# EAGLE board integration_board_widertraces (EAGLE 6.6.0)
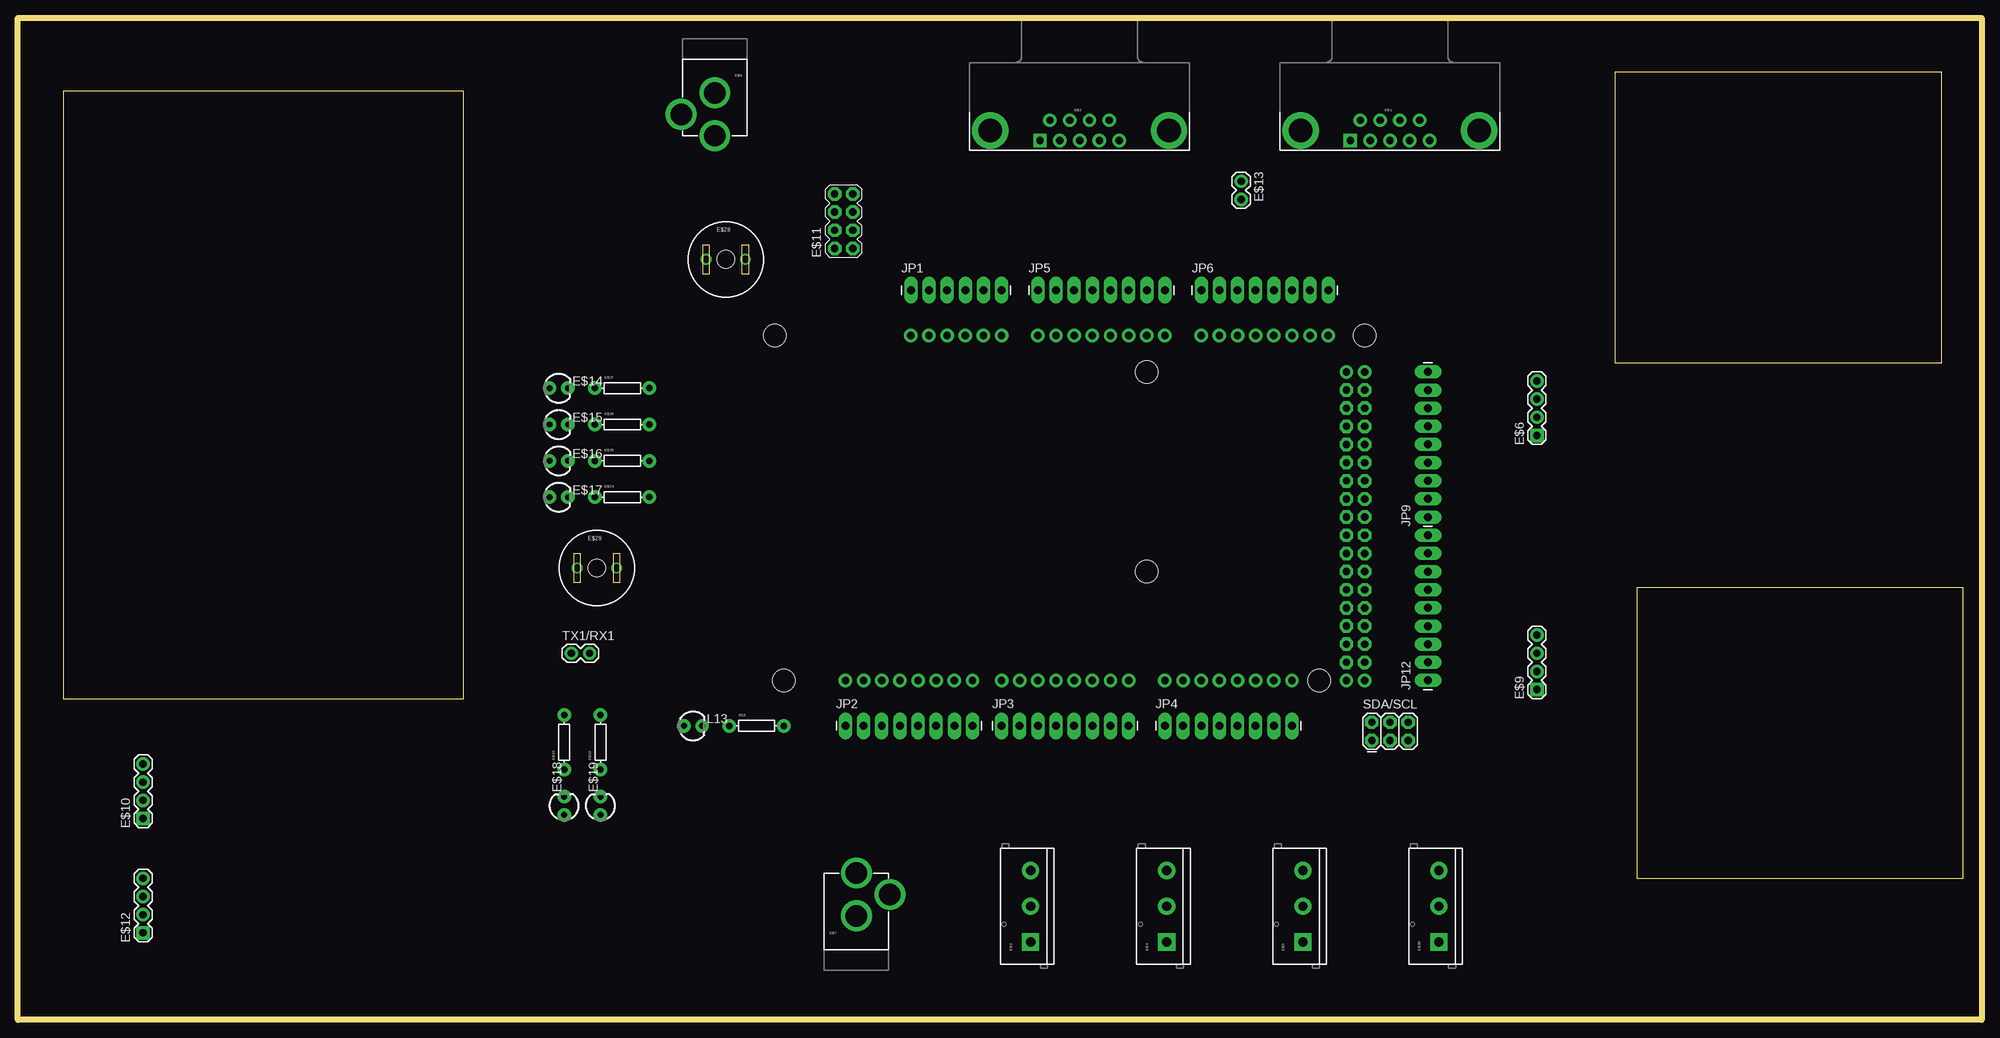
[diagram p0: board, top side]
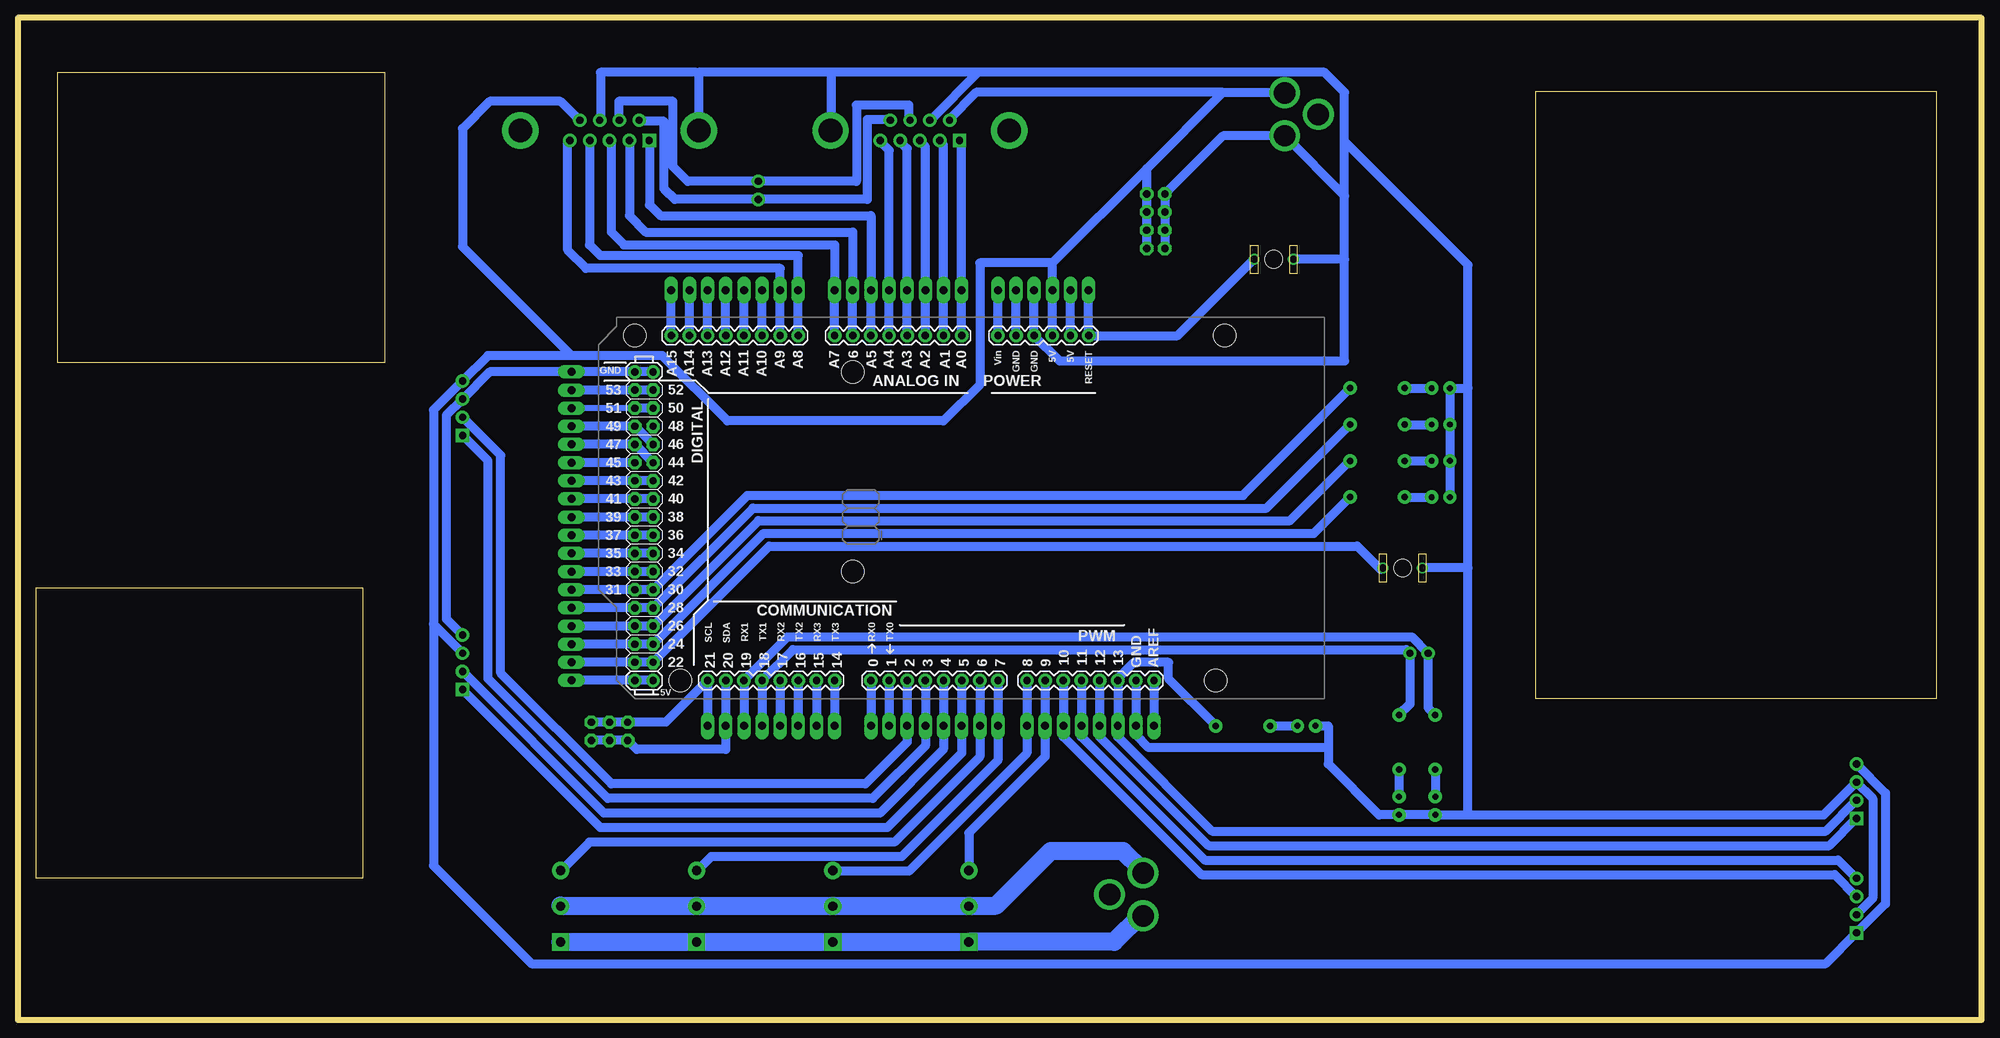
[diagram p1: board, bottom side, seen from below]

Size 274.83 x 140.21 mm. Coordinates in mm from the lower left corner, seen from the top.
Outline: 0,140.21 274.83,140.21 274.83,0 0,0 0,140.21
Copper layers (1*16): Top 0.035mm / dielectric 1.5mm / Bottom 0mil
Design rules "default *": minimum track width 32mil, minimum drill 24mil, track to track 8mil, track to pad 8mil, pad to pad 8mil, via to via 8mil, smd to smd 8mil, copper to edge 40mil, drill to drill 8mil, minimum pad ring 10mil, minimum via ring 8mil, stop-mask expansion 4mil, vias tented up to drill 0mil, thermal gap 10mil

## Footprints (pad centres in the part's own frame; a part is rotated, then mirrored left to right if it is on the bottom)
DB9 = drill 1.016 pad 1.88 square: 1 -5.54,-1.42 | drill 1.016 pad 1.88: 2 -2.77,-1.42; 3 0,-1.42; 4 2.77,-1.42; 5 5.54,-1.42; 6 -4.15,1.42; 7 -1.38,1.42; 8 1.38,1.42; 9 4.15,1.42 | drill 3.302 pad 5.08: G1 -12.5,0; G2 12.5,0
SCREWTERMINAL-5MM-3 = drill 1.3 pad 2.413 square: 1 0,0 | drill 1.3 pad 2.413: 2 5,0; 3 10,0
1X04 = drill 1.016 pad 1.88 square: 1 0,0 | drill 1.016 pad 1.88: 2 2.54,0; 3 5.08,0; 4 7.62,0
POWER_JACK_PTH = drill 2.997 pad 4.318: GND 0,7.7; GNDBREAK 4.7,10.7; PWR 0,13.7
2X4 = drill 1.016 pad 1.88 octagon: 1 -3.81,-1.27; 2 -3.81,1.27; 3 -1.27,-1.27; 4 -1.27,1.27; 5 1.27,-1.27; 6 1.27,1.27; 7 3.81,-1.27; 8 3.81,1.27
1X02 = drill 1.016 pad 1.88: 1 0,0; 2 2.54,0
LED3MM = drill 0.813 pad 1.88: A -1.27,0; K 1.27,0
AXIAL-0.3 = drill 0.9 pad 1.88: P$1 -3.81,0; P$2 3.81,0
BUTTON-10MM = drill 1: 1 -2.75,0; 2 2.75,0 | hole 2.5: 0,0
1X06_LONGPADS = drill 1.118 pad 1.88 long: 1 0,0; 2 2.54,0; 3 5.08,0; 4 7.62,0; 5 10.16,0; 6 12.7,0
1X08_LONGPADS = drill 1.118 pad 1.88 long: 1 0,0; 2 2.54,0; 3 5.08,0; 4 7.62,0; 5 10.16,0; 6 12.7,0; 7 15.24,0; 8 17.78,0
1X09_LONGPADS = drill 1.118 pad 1.88 long: 1 0,0; 2 2.54,0; 3 5.08,0; 4 7.62,0; 5 10.16,0; 6 12.7,0; 7 15.24,0; 8 17.78,0; 9 20.32,0
2X3 = drill 1.016 pad 1.88 octagon: 1 0,0; 2 0,2.54; 3 2.54,0; 4 2.54,2.54; 5 5.08,0; 6 5.08,2.54
ARDUINO_MEGA = drill 1.016 pad 1.88: 0 63.5,50.8; 1 60.96,50.8; 2 58.42,50.8; 3 55.88,50.8; 3.3V 35.56,2.54; 4 53.34,50.8; 5 50.8,50.8; 5V@0 38.1,2.54; 5V@1 93.98,50.8; 5V@2 96.52,50.8; 6 48.26,50.8; 7 45.72,50.8; 8 41.656,50.8; 9 39.116,50.8; 10 36.576,50.8; 11 34.036,50.8; 12 31.496,50.8; 13 28.956,50.8; 14 68.58,50.8; 15 71.12,50.8; 16 73.66,50.8; 17 76.2,50.8; 18 78.74,50.8; 19 81.28,50.8; 20 83.82,50.8; 21 86.36,50.8; A0 50.8,2.54; A1 53.34,2.54; A2 55.88,2.54; A3 58.42,2.54; A4 60.96,2.54; A5 63.5,2.54; A6 66.04,2.54; A7 68.58,2.54; A8 73.66,2.54; A9 76.2,2.54; A10 78.74,2.54; A11 81.28,2.54; A12 83.82,2.54; A13 86.36,2.54; A14 88.9,2.54; A15 91.44,2.54; AREF 23.876,50.8; GND@0 40.64,2.54; GND@1 43.18,2.54; GND@2 93.98,7.62; GND@3 96.52,7.62; GND@4 26.416,50.8; RESET 33.02,2.54; VIN 45.72,2.54 | drill 1.016 pad 1.88 octagon: 22 93.98,48.26; 23 96.52,48.26; 24 93.98,45.72; 25 96.52,45.72; 26 93.98,43.18; 27 96.52,43.18; 28 93.98,40.64; 29 96.52,40.64; 30 93.98,38.1; 31 96.52,38.1; 32 93.98,35.56; 33 96.52,35.56; 34 93.98,33.02; 35 96.52,33.02; 36 93.98,30.48; 37 96.52,30.48; 38 93.98,27.94; 39 96.52,27.94; 40 93.98,25.4; 41 96.52,25.4; 42 93.98,22.86; 43 96.52,22.86; 44 93.98,20.32; 45 96.52,20.32; 46 93.98,17.78; 47 96.52,17.78; 48 93.98,15.24; 49 96.52,15.24; 50 93.98,12.7; 51 96.52,12.7; 52 93.98,10.16; 53 96.52,10.16 | hole 3.2: 15.24,50.8; 13.97,2.54; 66.04,35.56; 66.04,7.62; 90.17,50.8; 96.52,2.54

## Placement (x,y rotation side)
E$1  [DB9]  192.02,124.46 0 top
E$2  [DB9]  148.59,124.46 0 top
E$3  [SCREWTERMINAL-5MM-3]  141.73,10.92 90 top
E$4  [SCREWTERMINAL-5MM-3]  160.78,10.92 90 top
E$5  [SCREWTERMINAL-5MM-3]  179.83,10.92 90 top
E$6  [1X04]  212.6,81.79 90 top
E$7  [POWER_JACK_PTH]  117.35,6.86 0 top
E$8  [POWER_JACK_PTH]  97.54,137.41 180 top
E$9  [1X04]  212.6,46.23 90 top
E$10  [1X04]  17.53,28.19 90 top
E$11  [2X4]  115.57,111.76 90 top
E$12  [1X04]  17.53,12.19 90 top
E$13  [1X02]  171.2,117.35 270 top
E$14  [LED3MM]  75.69,88.39 0 top
E$15  [LED3MM]  75.69,83.31 0 top
E$16  [LED3MM]  75.69,78.23 0 top
E$17  [LED3MM]  75.69,73.15 0 top
E$18  [LED3MM]  76.45,29.97 90 top
E$19  [LED3MM]  81.53,29.97 90 top
E$22  [AXIAL-0.3]  81.53,38.86 90 top
E$23  [AXIAL-0.3]  76.45,38.86 90 top
E$24  [AXIAL-0.3]  84.58,73.15 0 top
E$25  [AXIAL-0.3]  84.58,78.23 0 top
E$26  [AXIAL-0.3]  84.58,83.31 0 top
E$27  [AXIAL-0.3]  84.58,88.39 0 top
E$28  [BUTTON-10MM]  99.06,106.43 0 top
E$29  [BUTTON-10MM]  81.03,63.25 0 top
E$30  [SCREWTERMINAL-5MM-3]  198.88,10.92 90 top
JP1  [1X06_LONGPADS]  124.97,102.11 0 top
JP2  [1X08_LONGPADS]  115.82,41.15 0 top
JP3  [1X08_LONGPADS]  137.67,41.15 0 top
JP4  [1X08_LONGPADS]  160.53,41.15 0 top
JP5  [1X08_LONGPADS]  142.75,102.11 0 top
JP6  [1X08_LONGPADS]  165.61,102.11 0 top
JP9  [1X09_LONGPADS]  197.36,70.36 90 top
JP12  [1X09_LONGPADS]  197.36,47.5 90 top
L13  [LED3MM]  94.49,41.15 0 top
R13  [AXIAL-0.3]  103.38,41.15 0 top
SDA/SCL  [2X3]  189.48,39.12 0 top
TX1/RX1  [1X02]  77.47,51.31 0 top
U1  ARDUINO-MEGAFULL  [ARDUINO_MEGA]  91.95,98.3 180 bottom

## Library data of the parts
E$1-E$13 E$30 JP1-JP6 JP9 JP12 SDA/SCL TX1/RX1 = SparkFun-Connectors
E$14-E$19 L13 = SparkFun-LED
E$22-E$27 R13 = SparkFun-Resistors
E$28 E$29 = SparkFun-Electromechanical
U1 = SparkFun-Boards

## Nets
S$1: JP1.1 U1.RESET
S$2: JP1.2 U1.3.3V
S$3: E$10.3 E$11.2 E$11.4 E$11.6 E$11.8 E$12.2 E$14.A E$15.A E$16.A E$17.A E$18.A E$19.A JP1.4 JP2.2 L13.A U1.GND@0 U1.GND@4
S$5: JP1.5 U1.GND@1
S$6: JP1.6 U1.VIN
S$7: JP5.1 U1.A0
S$8: JP5.2 U1.A1
S$9: JP5.3 U1.A2
S$10: JP5.4 U1.A3
S$11: JP5.5 U1.A4
S$12: E$6.3 E$9.4
S$13: JP5.7 U1.A6
S$14: JP5.6 U1.A5
S$16: E$13.1
S$17: JP6.3 U1.A10
S$18: JP6.4 U1.A11
S$19: JP6.5 U1.A12
S$20: JP6.6 U1.A13
S$21: JP6.7 U1.A14
S$22: JP6.8 U1.A15
S$23: JP2.6 U1.10
S$24: R13.P$2
S$25: E$13.2
S$26: E$3.1 E$30.1
S$27: JP2.4 U1.12
S$28: JP2.7 U1.9
S$29: JP2.1 U1.AREF
S$31: JP2.5 U1.11
S$33: E$9.1 JP3.3 U1.5
S$34: E$9.2 JP3.4 U1.4
S$35: E$6.1 JP3.5 U1.3
S$36: E$6.2 JP3.6 U1.2
S$37: JP2.8 U1.8
S$39: JP4.1 U1.14
S$40: JP4.2 U1.15
S$41: JP4.3 U1.16
S$42: JP4.4 U1.17
S$43: E$22.P$2 JP4.5 TX1/RX1.2 U1.18
S$44: E$23.P$2 JP4.6 TX1/RX1.1 U1.19
S$45: JP4.7 SDA/SCL.1 SDA/SCL.5 U1.20
S$46: JP4.8 SDA/SCL.2 SDA/SCL.6 U1.21
S$47: E$27.P$2 JP12.6 U1.30
S$48: JP12.2 U1.22
S$49: E$24.P$2 JP12.3 U1.24
S$50: E$25.P$2 JP12.4 U1.26
S$51: E$26.P$2 JP12.5 U1.28
S$53: JP12.7 U1.32
S$54: JP12.8 U1.34
S$55: JP12.9 U1.36
S$56: JP9.1 U1.38
S$57: JP9.2 U1.40
S$58: JP9.3 U1.42
S$59: JP9.7 U1.50
S$60: JP9.8 U1.52
S$62: JP9.6 U1.46
S$63: JP9.5 U1.44
S$64: JP9.4 U1.45
S$67: JP9.9 U1.GND@2
S$68: JP3.7 U1.1
S$72: JP12.1 U1.5V@1
S$73: JP3.8 U1.0
S$74: E$14.K E$27.P$1
S$75: E$15.K E$26.P$1
S$76: E$16.K E$25.P$1
S$77: E$17.K E$24.P$1
S$78: E$18.K E$23.P$1
S$79: E$19.K E$22.P$1
S$80: L13.K R13.P$1
S$82: JP6.1 U1.A8
S$83: JP3.1 U1.7
S$84: JP3.2 U1.6
S$85: JP2.3 U1.13
S$86: JP5.8 U1.A7
S$87: E$10.2
S$88: E$10.1
S$89: E$12.4
S$90: E$12.3
S$91: U1.48
S$95: E$6.4 E$9.3 E$10.4 E$11.1 E$11.3 E$11.5 E$11.7 E$12.1 JP1.3 U1.5V@0
S$97: JP6.2 U1.A9

## Tracks (layer width: path | path; a pad name or v marks a point on that pad's centre or on a via)
S$1
  Bottom 1.27: U1.RESET JP1.1 124.97,102.36 | U1.RESET 112.52,95.76 101.85,106.43 | U1.RESET 124.97,95.5
S$2
  Bottom 1.27: 127.51,95.5 U1.3.3V JP1.2 127.51,102.36
S$3
  Bottom 0.813: 118.36,39.88 JP2.2 | 132.59,103.38 132.59,102.36 | 179.83,132.59 179.58,132.59
  Bottom 1.27: 118.36,47.75 U1.GND@4 JP2.2 118.36,40.89 | 118.36,39.88 116.59,38.1 91.44,38.1 | L13.A 91.44,41.15 91.44,38.1 | 17.78,14.73 E$12.2 15.24,17.02 15.24,30.99 E$10.3 | 91.44,38.1 91.44,35.81 84.33,28.7 E$19.A E$18.A 71.88,28.7 | E$10.3 17.78,33.27 | E$17.A E$16.A E$15.A E$14.A 71.88,88.39 | E$10.3 22.1,28.7 71.88,28.7 | 71.88,28.7 71.88,63.25 | 71.88,63.25 78.23,63.25 | 71.88,63.25 71.88,88.39 | 71.88,88.39 71.88,105.66 89.15,122.94 | 114.3,107.7 E$11.2 114.3,110.24 E$11.4 114.3,112.78 E$11.6 114.3,115.32 E$11.8 106.17,123.7 97.54,123.7 89.15,115.32 | 193.55,125.73 193.29,125.98 193.29,132.59 179.83,132.59 | 140.46,132.59 147.07,125.98 | 140.46,132.59 161.04,132.59 | 161.04,132.59 179.58,132.59 179.58,124.21 | 140.46,132.59 91.95,132.59 89.15,129.79 89.15,122.94 | 89.15,115.32 89.15,122.94 | 89.15,106.43 89.15,115.32 | 89.15,106.43 96.01,106.43 | 89.15,106.43 89.15,92.2 129.03,92.2 U1.GND@0 | U1.GND@0 132.59,95.5 | U1.GND@0 JP1.4 132.59,102.36 | 161.04,132.59 161.04,124.21
  Bottom 3.81: 97.28,123.7 97.54,123.7 | 161.04,124.46 161.04,124.21 | 179.32,124.46 179.58,124.21
S$4
  Bottom 3.81: 117.35,20.83 117.35,20.57
S$5
  Bottom 1.27: 135.13,95.5 U1.GND@1 JP1.5 135.13,102.36
S$6
  Bottom 1.27: 137.67,95.5 U1.VIN JP1.6 137.67,102.36
S$7
  Bottom 0.813: 142.75,122.68 143,122.94
  Bottom 1.27: 142.75,122.68 JP5.1 142.75,101.85 U1.A0 142.75,95.5 | 143,122.94 143,123.19
S$8
  Bottom 1.27: 145.29,95.5 U1.A1 145.29,101.85 JP5.2 145.29,122.43 145.8,122.94 145.8,123.19
S$9
  Bottom 1.27: 147.83,95.5 U1.A2 147.83,101.85 JP5.3 147.83,122.17 148.59,122.94 148.59,123.19
S$10
  Bottom 1.27: 150.37,95.5 U1.A3 150.37,101.85 JP5.4 150.37,121.92 151.38,122.94 151.38,123.19
S$11
  Bottom 1.27: 152.91,95.5 U1.A4 152.91,101.85 JP5.5 152.91,121.67 154.18,122.94 154.18,123.19
S$12
  Bottom 1.27: 197.61,90.68 208.79,90.68 E$6.3 | E$6.3 214.88,84.58 214.88,56.13 E$9.4 212.6,53.59 | E$6.3 212.6,86.61
S$13
  Bottom 0.813: JP5.7 157.99,103.38
  Bottom 1.27: 157.99,95.5 U1.A6 157.99,101.85 JP5.7 157.99,110.24 186.94,110.24 189.23,112.52 189.23,122.94 189.23,123.19
S$14
  Bottom 1.27: 155.45,95.5 U1.A5 155.45,101.85 JP5.6 155.45,112.52 184.91,112.52 186.44,114.05 186.44,122.68 186.44,123.19
S$15
  Bottom 1.27: 171.45,117.35 181.1,117.35 183.13,119.38
S$16
  Bottom 1.27: 150.11,125.98 150.11,128.02 157.48,128.02 157.48,117.35 E$13.1
S$17
  Bottom 1.27: JP6.3 170.69,101.85 U1.A10 170.69,95.5
S$18
  Bottom 1.27: JP6.4 173.23,101.85 U1.A11 173.23,95.5
S$19
  Bottom 1.27: JP6.5 175.77,101.85 U1.A12 175.77,95.5
S$20
  Bottom 1.27: JP6.6 178.31,101.85 U1.A13 178.31,95.5
S$21
  Bottom 1.27: JP6.7 180.85,101.85 U1.A14 180.85,95.5
S$22
  Bottom 1.27: JP6.8 183.39,101.85 U1.A15 183.39,95.5
S$23
  Bottom 1.27: 128.52,40.89 JP2.6 128.52,47.24 U1.10
S$24
  Bottom 1.27: 121.16,47.5 118.62,50.04 113.79,50.04 113.79,47.75 R13.P$2 106.93,41.15
S$25
  Bottom 1.27: 152.91,125.98 155.96,125.98 155.96,114.81 E$13.2 182.88,114.81 184.4,116.33 184.4,125.73 187.96,125.73 187.96,125.98
S$26
  Bottom 2.54: E$30.1 E$3.1 121.41,10.92 117.6,14.73
S$27
  Bottom 1.27: 123.44,40.89 JP2.4 123.44,47.24 U1.12
S$28
  Bottom 0.813: 131.06,40.89 131.06,40.13
  Bottom 1.27: JP2.7 131.06,40.89 | JP2.7 131.06,47.24 U1.9 | JP2.7 131.06,36.83 141.73,26.16 141.73,20.83
  Bottom 1.778: 141.73,20.83 141.99,20.83
S$29
  Bottom 1.27: 115.82,40.89 JP2.1 115.82,47.24 | 116.08,47.5 arc90 115.82,47.24 | 115.82,47.24 U1.AREF
S$30
  Bottom 3.81: 117.35,14.73 117.09,14.48
S$31
  Bottom 1.27: 125.98,40.89 JP2.5 125.98,47.24 U1.11
S$32
  Bottom 3.81: 92.71,126.75 92.96,126.75
S$33
  Bottom 1.27: JP3.3 U1.5 142.75,47.75 | JP3.3 142.75,37.34 153.16,26.92 193.29,26.92 E$9.1 212.6,46.48 | JP3.3 143,41.15
S$34
  Bottom 1.27: 212.6,49.02 E$9.2 192.79,28.96 154.18,28.96 145.29,37.85 JP3.4 145.29,41.4 U1.4 145.29,47.75
S$35
  Bottom 1.27: 212.6,82.04 E$6.1 209.04,78.23 209.04,47.75 192.28,30.99 155.19,30.99 147.83,38.35 JP3.5 147.83,41.4 U1.3 147.83,47.75
S$36
  Bottom 1.27: 212.6,84.58 E$6.2 207.26,78.99 207.26,48.51 191.77,33.02 156.21,33.02 150.37,38.86 JP3.6 150.37,41.4 U1.2 150.37,47.75
S$37
  Bottom 1.27: U1.8 133.6,47.24 133.6,41.4 JP2.8 133.6,37.34 150.11,20.83 160.78,20.83
  Bottom 1.778: 160.78,20.83 161.04,20.83
S$38
  Bottom 0.813: 155.19,48.01 155.7,47.5
S$39
  Bottom 1.27: 160.53,47.75 U1.14 160.53,41.4 JP4.1
S$40
  Bottom 1.27: 163.07,47.75 U1.15 163.07,41.4 JP4.2
S$41
  Bottom 1.27: 165.61,47.75 U1.16 165.61,41.4 JP4.3
S$42
  Bottom 1.27: 168.15,47.75 U1.17 168.15,41.4 JP4.4
S$43
  Bottom 1.27: U1.18 170.69,41.4 JP4.5 | U1.18 166.37,51.82 80.52,51.82 TX1/RX1.2 | TX1/RX1.2 80.01,44.2 E$22.P$2 81.53,42.42 | U1.18 170.69,47.75 | TX1/RX1.2 79.76,51.31
S$44
  Bottom 1.27: U1.19 173.23,41.4 JP4.6 | U1.19 167.13,53.59 79.76,53.59 TX1/RX1.1 77.47,43.69 E$23.P$2 76.45,42.42 | U1.19 173.23,47.75
S$45
  Bottom 1.27: SDA/SCL.1 188.21,37.85 175.77,37.85 JP4.7 175.77,41.4 U1.20 175.77,47.75 | SDA/SCL.1 192.02,39.12 | 192.02,39.12 SDA/SCL.5 194.56,39.37 | 192.02,39.12 192.02,39.37 | SDA/SCL.1 189.48,39.37
S$46
  Bottom 1.27: U1.21 178.31,41.4 JP4.8 | U1.21 184.15,41.66 SDA/SCL.2 | SDA/SCL.2 192.02,41.66 | 192.02,41.66 SDA/SCL.6 194.56,41.91 | SDA/SCL.2 189.48,41.91 | 192.02,41.66 192.02,41.91 | U1.21 178.31,47.75
S$47
  Bottom 1.27: 197.61,60.2 JP12.6 188.72,60.2 188.47,60.2 186.18,60.2 U1.30 172.72,73.41 103.38,73.41 E$27.P$2 88.14,88.39
S$48
  Bottom 1.27: U1.22 188.47,50.04 | 188.47,50.04 JP12.2 197.61,50.04 | U1.22 169.67,66.29 87.38,66.29 84.07,62.99 | 188.47,50.04 188.47,50.29 | U1.22 185.93,50.29
S$49
  Bottom 1.27: U1.24 188.47,52.58 | 188.47,52.58 JP12.3 197.61,52.58 | U1.24 170.43,68.07 93.47,68.07 E$24.P$2 88.39,73.41 | 188.47,52.58 188.47,52.83 | U1.24 185.93,52.83
S$50
  Bottom 1.27: E$25.P$2 96.77,69.85 171.2,69.85 U1.26 186.18,55.12 188.47,55.12 188.72,55.12 JP12.4 197.61,55.12
S$51
  Bottom 1.27: 197.61,57.66 JP12.5 188.72,57.66 188.47,57.66 186.18,57.66 U1.28 171.96,71.63 100.08,71.63 E$26.P$2 88.14,83.31
S$52
  Bottom 3.81: 136.14,124.46 136.4,124.71
S$53
  Bottom 1.27: 197.61,62.74 JP12.7 188.72,62.74 188.47,62.74 186.18,62.74 U1.32
S$54
  Bottom 1.27: 188.47,65.28 U1.34 185.93,65.02 | 188.47,65.28 JP12.8 197.61,65.28 | 188.47,65.28 188.47,65.02
S$55
  Bottom 1.27: 188.47,67.82 U1.36 185.93,67.56 | 188.47,67.82 JP12.9 197.61,67.82 | 188.47,67.82 188.47,67.56
S$56
  Bottom 1.27: 188.47,70.36 U1.38 185.93,70.1 | 188.47,70.36 JP9.1 197.61,70.36 | 188.47,70.36 188.47,70.1
S$57
  Bottom 1.27: 188.47,72.9 U1.40 185.93,72.64 | 188.47,72.9 JP9.2 197.61,72.9 | 188.47,72.9 188.47,72.64
S$58
  Bottom 1.27: 188.47,75.44 U1.42 185.93,75.18 | 188.47,75.44 JP9.3 197.61,75.44 | 188.47,75.44 188.47,75.18
S$59
  Bottom 0.813: 188.47,85.6 JP9.7
  Bottom 1.27: 185.93,85.85 U1.50 188.47,85.6 188.47,85.34 | JP9.7 197.61,85.6
S$60
  Bottom 1.27: 188.47,88.14 U1.52 185.93,87.88 | 188.47,88.14 JP9.8 197.61,88.14 | 188.47,88.14 188.47,87.88
S$61
  Bottom 0.813: 183.13,119.63 181.1,117.6
  Bottom 1.27: 183.13,119.63 183.13,128.52 190.75,128.52 190.75,125.73 190.75,125.98
S$62
  Bottom 1.27: 188.47,83.06 U1.46 185.93,80.26 | 188.47,83.06 JP9.6 197.61,83.06 | 188.47,83.06 188.47,82.8
S$63
  Bottom 1.27: 188.47,80.52 U1.44 185.93,77.72 | 188.47,80.52 JP9.5 197.61,80.52 | 188.47,80.52 188.47,80.26
S$64
  Bottom 1.27: 188.47,77.72 U1.45 JP9.4 197.61,77.98
S$66
  Bottom 2.54: 117.6,21.08 120.14,23.62 130.3,23.62 137.92,16 198.88,16
S$67
  Bottom 1.27: 188.47,90.68 U1.GND@2 185.93,90.42 | 188.47,90.68 JP9.9 197.36,90.42 | 188.47,90.68 188.47,90.42
S$68
  Bottom 1.27: JP3.7 152.91,41.4 U1.1 152.91,47.75
S$70
  Bottom 3.81: 204.22,124.21 204.47,124.46
S$71
  Bottom 3.81: 121.92,17.53 122.17,17.53
S$72
  Bottom 1.27: 188.47,47.5 U1.5V@1 185.93,47.75 | 188.47,47.5 JP12.1 197.36,47.75 | 188.47,47.5 188.47,47.75
S$73
  Bottom 0.813: U1.0 155.7,47.24
  Bottom 1.27: JP3.8 155.45,41.4 155.45,47.24 U1.0
S$74
  Bottom 1.27: E$14.K E$27.P$1 81.03,88.39
S$75
  Bottom 1.27: E$15.K E$26.P$1 81.03,83.31
S$76
  Bottom 1.27: E$16.K E$25.P$1 81.03,78.23
S$77
  Bottom 1.27: E$17.K E$24.P$1 81.03,73.15
S$78
  Bottom 1.27: E$18.K E$23.P$1 76.45,35.31
S$79
  Bottom 1.27: E$19.K E$22.P$1 81.53,35.31
S$80
  Bottom 1.27: L13.K R13.P$1 99.82,41.15
S$82
  Bottom 0.813: 165.61,103.38 JP6.1 165.61,106.68
  Bottom 1.27: 165.61,95.5 U1.A8 165.61,101.85 JP6.1 165.61,106.93 193.29,106.93 194.82,108.46 194.82,122.94 194.82,123.19
S$83
  Bottom 1.27: 179.83,20.83 177.8,22.86 151.13,22.86 137.67,36.32 JP3.1 137.67,41.4 U1.7 137.41,47.5
  Bottom 1.778: 179.83,20.83 179.83,21.08
S$84
  Bottom 1.27: 140.21,47.75 U1.6 140.21,41.4 JP3.2 140.21,36.83 152.15,24.89 194.82,24.89 198.88,20.83 198.88,21.08 198.63,20.83 199.14,20.83
S$85
  Bottom 0.813: 121.16,41.15 JP2.3
  Bottom 1.27: 120.9,40.89 JP2.3 120.9,47.24 U1.13
S$86
  Bottom 0.813: 191.77,122.94 192.02,122.94
  Bottom 1.27: 160.53,95.5 U1.A7 160.53,101.85 JP5.8 160.53,108.46 189.99,108.46 191.77,110.24 191.77,122.94 | 192.02,122.94 192.02,123.19
S$87
  Bottom 1.27: 120.9,39.62 107.7,26.42 21.84,26.42 E$10.2 17.78,30.73
S$88
  Bottom 1.27: 123.44,39.62 108.2,24.38 21.34,24.38 E$10.1 17.78,28.19
S$89
  Bottom 1.27: 125.98,39.62 108.71,22.35 20.07,22.35 E$12.4 17.78,19.81
S$90
  Bottom 1.27: 128.52,39.62 109.22,20.32 20.57,20.32 E$12.3 17.78,17.27
S$91
  Bottom 1.27: U1.48 185.93,83.31
S$92
  Bottom 1.27: 147.32,125.98 147.32,125.73
S$93
  Bottom 1.27: 149.86,125.98 149.86,125.73
S$94
  Bottom 1.27: 77.72,51.31 77.22,51.31
S$95
  Bottom 0.813: 129.54,102.62 JP1.3
  Bottom 1.27: 196.09,125.98 196.09,125.73 198.88,128.52 208.79,128.52 212.6,124.71 212.6,108.2 197.36,92.96 | JP1.3 U1.5V@0 130.05,95.5 | JP1.3 130.05,105.92 | 130.05,105.92 116.84,119.13 | 116.84,119.13 106.17,129.79 | 106.17,129.79 97.79,129.79 | 116.84,119.13 E$11.7 116.84,115.32 E$11.5 116.84,112.78 E$11.3 116.84,110.24 E$11.1 116.84,107.7 | 106.17,129.79 140.72,129.79 144.53,125.98 144.53,125.73 | 130.05,105.92 140.21,105.92 140.21,88.9 145.29,83.82 175.51,83.82 184.66,92.96 197.36,92.96 | 197.36,92.96 209.04,92.96 E$6.4 | E$6.4 216.66,85.34 216.66,55.37 | 216.66,55.37 E$9.3 212.6,51.05 | 216.66,55.37 216.66,21.59 202.95,7.87 21.84,7.87 E$12.1 | E$12.1 13.46,16.26 13.46,31.75 E$10.4 17.78,35.81 | JP1.3 130.3,102.11 | E$6.4 212.6,89.15 | E$12.1 17.78,12.19
  Bottom 3.81: 97.54,129.79 97.79,129.79
S$96
  Bottom 1.27: 152.65,125.73 152.65,125.98
S$97
  Bottom 1.27: JP6.2 168.15,101.85 | 168.15,101.85 U1.A9 168.15,95.5 | 168.15,101.85 168.15,105.16 195.33,105.16 197.87,107.7 197.87,122.94 197.61,123.19